# Altium PCB Busboard_PCB.PcbDoc
Units mm, origin at the board's own origin, x right, y up, seen from the top; angles counter-clockwise.
Board outline 171 x 32 mm, 2 copper layers (Top Layer, Bottom Layer); 11 components, 11 nets, 107 pads, 0 vias.
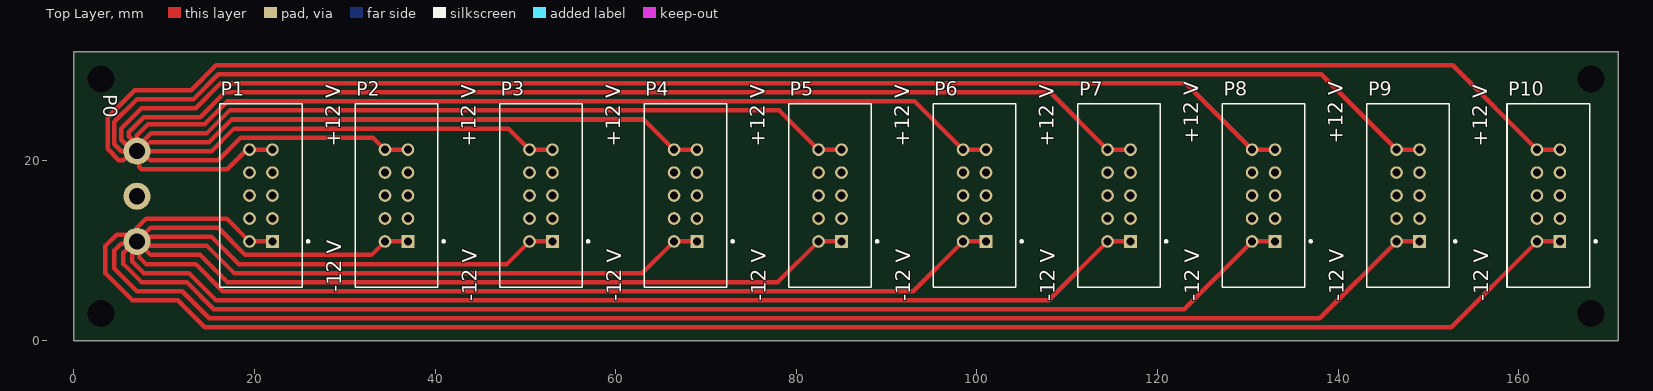
[diagram p0: Top Layer view]
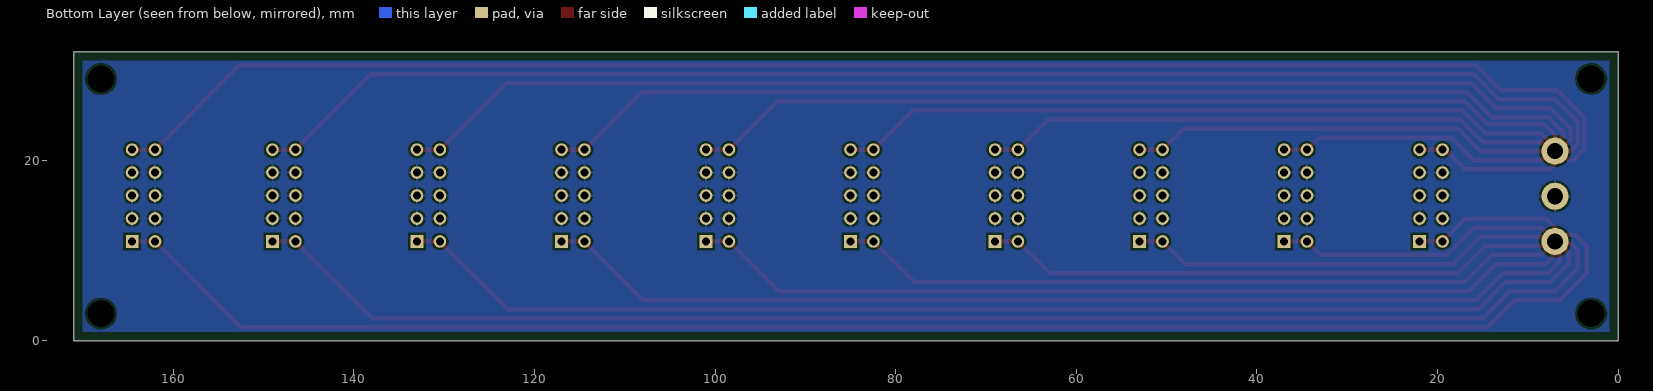
[diagram p1: Bottom Layer view, seen from below]

## Layer stack, top to bottom
Top Solder: solder mask 0.0102, Solder Resist, Dk 3.5
Top Layer: signal copper 0.0356
Dielectric 1: dielectric 0.32, FR-4, Dk 4.8
Bottom Layer: signal copper 0.0356
Bottom Solder: solder mask 0.0102, Solder Resist, Dk 3.5

## Board outline
0,0 171,0 171,32 0,32

## Design rules (kind name [scope] priority, off if disabled: settings)
Clearance [All] p1: gap=0.254 ignorepadtopadclearanceinfootprint=FALSE except(0: Arc-Hole Track-Hole SMDPad-Hole THPad-Hole Via-Hole Fill-Hole Poly-Hole Region-Hole Text-Hole)
PolygonConnect [All] p1: connectstyle=Relief reliefconductorwidth=0.254 reliefentries=4 polygonreliefangle="90 Angle" airgapwidth=0.254
RoutingVias [All] p1: holewidth=0.711 width=1.27 viastyle="Through Hole" minholewidth=0.711 minwidth=1.27 maxholewidth=0.711 maxwidth=1.27
SolderMaskExpansion [All] p1: expansion=0.102 istentingtop=FALSE
Width [All] p1: maxlimit=0.254 minlimit=0.254 preferedwidth=0.254
30 further rules are at their usual default settings.

## Components (designator, comment, footprint, x,y, rotation, side; value= is the part's Value field where it differs from the comment)
P0 "Header 3" "Terminal Block" 7,16 r0 top
P1 "5103308-1" TECO-5103308-1_V 20.73,16.08 r90 top
P2 "5103308-1" TECO-5103308-1_V 35.73,16.08 r90 top
P3 "5103308-1" TECO-5103308-1_V 51.73,16.08 r90 top
P4 "5103308-1" TECO-5103308-1_V 67.73,16.08 r90 top
P5 "5103308-1" TECO-5103308-1_V 83.73,16.08 r90 top
P6 "5103308-1" TECO-5103308-1_V 99.73,16.08 r90 top
P7 "5103308-1" TECO-5103308-1_V 115.73,16.08 r90 top
P8 "5103308-1" TECO-5103308-1_V 131.73,16.08 r90 top
P9 "5103308-1" TECO-5103308-1_V 147.73,16.08 r90 top
P10 "5103308-1" TECO-5103308-1_V 163.27,16.08 r90 top

## Footprints (in the part's own frame and the unit in brackets; to place one, negate y for a bottom-side part, rotate by r counter-clockwise, add the part's x,y. Pads: shape width x height; smd on the part's side, far side on the other; paste and mask are expansions set on the pad)
TECO-5103308-1_V [mm] "Connector, 10-Leads, Body 20.32x9.14mm, Pitch 2.54mm"
  rect 1.4x1.4 hole 0.89: 1(-5.08,-1.27)
  round 1.4 hole 0.89: 2(-5.08,1.27) 3(-2.54,-1.27) 4(-2.54,1.27) 5(0,-1.27) 6(0,1.27) 7(2.54,-1.27) 8(2.54,1.27) 9(5.08,-1.27) 10(5.08,1.27)
  silkscreen extent -10.16,-5.35 10.16,4.57, body extent -10.16,-4.57 10.16,4.57, height 9.86
"Terminal Block" [mm]
  round 3 hole 1.8: 1(0,-5) 2(0,0) 3(0,5)

## Part data
P0: "Header, 3-Pin", LatestRevisionDate=17-Jul-2002, LatestRevisionNote="Re-released for DXP Platform.", Publisher="Altium Limited"
P1 P2 P3 P4 P5 P6 P7 P8 P9 P10: library part CMP-2000-05416-1, "Male Header, Pitch 2.54 mm, 2 x 5 Position, Height 9.85 mm, Tail Length 3.05 mm, RoHS, Tube", Color=Black, Manufacturer="TE Connectivity", Standard Package=125, 3D Model=5103308-1.pdf, Catalog Drawings=LowProfileShroudedStraight, Category=Connectors,Interconnects, Connector Type=Header,Shrouded, Contact Finish=GoldorGold-Palladium, Contact Finish Thickness=15µin(0.38µm), Contact Mating Length="0.240\"(6.10mm)", Contact Type=MalePin, Datasheet URL=http://www.onlinecomponents.com/productFiles/mf-AMP/eng_cat_889409_0699_96_.pdf, Datasheet Version=Apr-12, Dynamic Catalog=AMP-LatchSeries, Family=RectangularConnectors-Headers,MalePins, Featured Product=AMP-LATCHRibbonCableConnectors, Manufacturer URL=http://www.te.com/, Mating Products="1658624-1-ND / -CONNRCPT10POSPOLARGOLD / 1658527-4-ND / -CONNRCPT10POS.100W/STRRELF / 1658527-3-ND / -CONNRCPT10POS.100622SERIES / 1658526-3-ND / -CONNRCPT10POSVERTGOLD / 1658526-5-ND / -609-1041LFFEMSOCKT,LEADFREE / 1658526-4-ND / -609-1030LFFEMSOCKT,LEADFREE / ASC10B-ND / -CONNIDCSOCKET10POSGOLD / ASC10H-ND / -CONNIDCSOCKET10POS15GOLD / AKC10B-ND / -CONNIDCSKT10POSW/POLGOLD / AKC10H-ND / -CONNIDCSKT10POSW/POL15GOLD / More...", Mounting Type=ThroughHole, Number of Positions=10, Number of Positions Loaded=All, Number of Rows=2, Other Names=A33159, Packaging=Tube, Pitch="0.100\"(2.54mm)", RoHS Information=5103308-1StatementofCompliance, Row Spacing="0.100\"(2.54mm)", Series=AMP-Latch, Termination=Solder

## Free pads (board coordinates)
  oval 0x1.524 hole 3 unplated: 2(3,29) 3(3,3) 4(168,29) 5(168,3)

## Nets (pads, with @x,y where several pads share a name; then routed paths per layer and width w, separated by ;. In a path a pad name is that pad's centre, name@x,y a point inside that pad or via, vN(x,y) a via of type N, cw(c..) or ccw(c..) an arc to the next point about the centre after c; other vN are vias at no path point)
+12: P0.3 P1.9 P1.10 P2.9 P2.10 P3.9 P3.10 P4.9 P4.10 P5.9 P5.10 P6.9 P6.10 P7.9 P7.10 P8.9 P8.10 P9.9 P9.10 P10.9 P10.10 | length 926.2
  Top Layer w0.5: P0.3@6.268,21.232 5.25,22.25 5.25,23.5 7.5,25.75 13.5,25.75 16.25,28.5 123.12,28.5 P8.10 P8.9 ; P0.3@6.268,21.25 6.518,21 P0.3 ; P0.3@6.5,21 P0.3@6.25,20.75 ; P0.3@7,21.5 P0.3@7,21.743 ; P1.9 P1.10 19.16,21.16 17,19 7.5,19 7.232,19.268 7.232,20.768 P0.3@7.131,20.869 ; P2.9 P2.10 33.12,22.5 18.5,22.5 16,20 8.45,20 7.581,20.869 P0.3@7.131,20.869 ; P3.9 P3.10 48.12,23.5 17.75,23.5 15.25,21 P0.3 ; P4.9 P4.10 63.12,24.5 17.5,24.5 15,22 8.45,22 7.95,21.5 P0.3@7.093,21.5 ; P5.9 P5.10 78.12,25.5 17.25,25.5 14.75,23 8.593,23 P0.3@7.093,21.5 ; P6.9 P6.10 93.12,26.5 17,26.5 14.5,24 8.25,24 7,22.75 P0.3@7,21.743 ; P7.9 P7.10 108.12,27.5 16.75,27.5 14,24.75 7.75,24.75 6.105,23.105 6.105,22.638 P0.3@7,21.743 ; P9.9 P9.10 138.12,29.5 16,29.5 13.25,26.75 7,26.75 4.5,24.25 4.5,21.75 5.268,20.982 6.018,20.982 P0.3@6.25,20.75 ; P10.9 P10.10 152.66,30.5 15.75,30.5 13,27.75 6.75,27.75 3.75,24.75 3.75,21.25 5,20 5.5,20 P0.3@6.25,20.75 ; P0.3@6.25,20.75 6.75,20.75 P0.3 ; P0.3 7,21.407 P0.3@7.093,21.5 ; P0.3 P0.3@7.131,20.869
-12: P0.1 P1.1 P1.2 P2.1 P2.2 P3.1 P3.2 P4.1 P4.2 P5.1 P5.2 P6.1 P6.2 P7.1 P7.2 P8.1 P8.2 P9.1 P9.2 P10.1 P10.2 | length 925.6
  Top Layer w0.5: P0.1@6.561,10.811 5.5,9.75 5.5,8.5 7.5,6.5 12.5,6.5 15.5,3.5 122.96,3.5 P8.2 P8.1 ; P0.1@6.604,10.768 5.268,10.768 4.5,10 4.5,8 7,5.5 12,5.5 15,2.5 137.96,2.5 P9.2 P9.1 ; P1.1 P1.2 16.96,13.5 8,13.5 7,12.5 P0.1 ; P2.1 P2.2 32.96,9.5 19,9.5 16,12.5 8.5,12.5 P0.1@7.5,11.5 ; P3.1 P3.2 47.96,8.5 18.25,8.5 15.25,11.5 P0.1@7.5,11.5 ; P4.1 P4.2 62.96,7.5 17.75,7.5 14.75,10.5 P0.1@7.5,10.5 ; P5.1 P5.2 77.96,6.5 17,6.5 14,9.5 8.5,9.5 P0.1@7.5,10.5 ; P6.1 P6.2 92.96,5.5 16.5,5.5 13.5,8.5 8,8.5 7.232,9.268 P0.1@7.232,10.768 ; P7.1 P7.2 107.96,4.5 15.75,4.5 12.75,7.5 7.75,7.5 6.5,8.75 6.5,10.5 P0.1 ; P10.1 P10.2 152.5,1.5 14.5,1.5 11.5,4.5 6.5,4.5 3.5,7.5 3.5,10.5 4.75,11.75 6.188,11.75 6.937,11 P0.1 ; P0.1 P0.1@7.5,11.5 ; P0.1 P0.1@7.232,10.768 ; P0.1@7.232,10.768 P0.1@7.5,10.5
GND: P0.2 P1.3 P1.4 P1.5 P1.6 P1.7 P1.8 P2.3 P2.4 P2.5 P2.6 P2.7 P2.8 P3.3 P3.4 P3.5 P3.6 P3.7 P3.8 P4.3 P4.4 P4.5 P4.6 P4.7 P4.8 P5.3 P5.4 P5.5 P5.6 P5.7 P5.8 P6.3 P6.4 P6.5 P6.6 P6.7 P6.8 P7.3 P7.4 P7.5 P7.6 P7.7 P7.8 P8.3 P8.4 P8.5 P8.6 P8.7 P8.8 P9.3 P9.4 P9.5 P9.6 P9.7 P9.8 P10.3 P10.4 P10.5 P10.6 P10.7 P10.8
NetP1_4: 
NetP1_6: 
NetP1_10: 
NetP6_10: 
NetP8_2: 
NetP8_10: 
NetP9_2: 
NetP9_10: 

## Polygon pours and split planes (outlines as drawn)
GND on Bottom Layer "GND_L02_P005" (solid, remove dead copper, pour order 5): 1,31 170,31 170,1 1,1
no net on Bottom Layer "NONET_L02_P000" (solid, remove dead copper, pour order 0): 14,30

## Silkscreen, mask and mechanical layers (free items; w line width, h text height)
Top Overlay:
  text "+12 V" at 124.477,21.831 h1.6 r90
  text "+12 V" at 140.477,21.831 h1.6 r90
  text "+12 V" at 29.5,21.5 h1.6 r90
  text "+12 V" at 44.5,21.5 h1.6 r90
  text "+12 V" at 60.5,21.5 h1.6 r90
  text "+12 V" at 76.5,21.5 h1.6 r90
  text "+12 V" at 92.5,21.5 h1.6 r90
  text "+12 V" at 108.5,21.5 h1.6 r90
  text "+12 V" at 156.5,21.5 h1.6 r90
  text "-12 V" at 29.6,5.4 h1.6 r90
  text "-12 V" at 44.6,4.4 h1.6 r90
  text "-12 V" at 60.6,4.4 h1.6 r90
  text "-12 V" at 76.6,4.4 h1.6 r90
  text "-12 V" at 92.6,4.4 h1.6 r90
  text "-12 V" at 108.6,4.4 h1.6 r90
  text "-12 V" at 124.6,4.4 h1.6 r90
  text "-12 V" at 140.6,4.4 h1.6 r90
  text "-12 V" at 156.6,4.4 h1.6 r90
Mechanical 1:
  the board outline again, w0.254